# EAGLE board AVRtest (EAGLE 7.2.0)
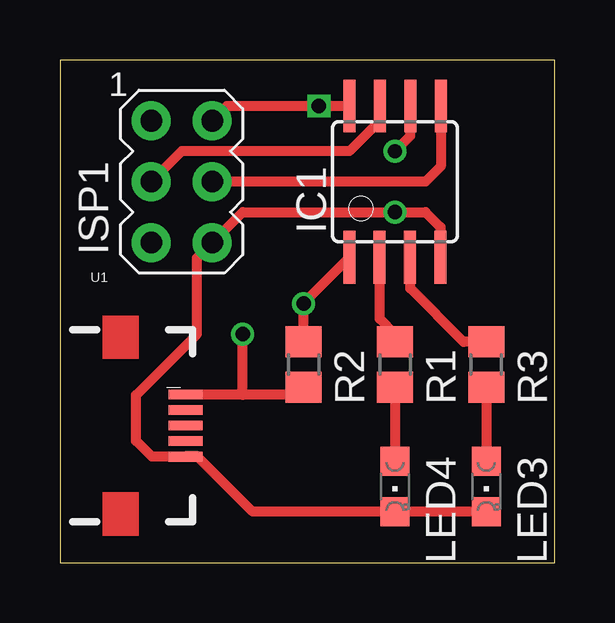
[diagram p0: board, top side]
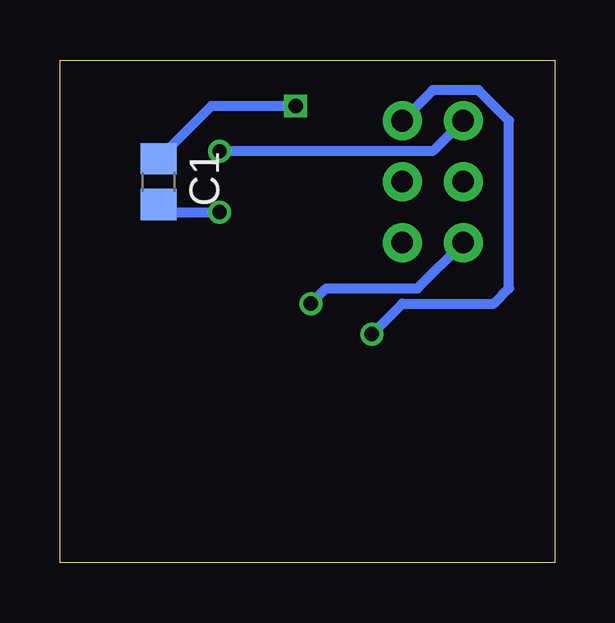
[diagram p1: board, bottom side, seen from below]

Size 20.62 x 20.95 mm. Coordinates in mm from the lower left corner, seen from the top.
Outline: 0,0 20.62,0 20.62,20.95 0,20.95 0,0
Copper layers (1*16): Top 0.0356mm / dielectric 1.5011mm / Bottom 0.0356mm
Design rules "LaenPCBOrder": minimum track width 6mil, minimum drill 13mil, track to track 6mil, track to pad 6mil, pad to pad 6mil, via to via 6mil, smd to smd 6mil, copper to edge 15mil, drill to drill 6mil, minimum pad ring 7mil, minimum via ring 7mil, stop-mask expansion 3mil, vias tented up to drill 0mil, thermal gap 10mil

## Footprints (pad centres in the part's own frame; a part is rotated, then mirrored left to right if it is on the bottom)
C0805 = smd 1.3 x 1.5: 1 -0.95,0; 2 0.95,0
SOIC8 = smd 0.5 x 2.2: 1 -1.905,-3.154; 2 -0.645,-3.154; 3 0.625,-3.154; 4 1.895,-3.154; 5 1.905,3.154; 6 0.635,3.154; 7 -0.635,3.154; 8 -1.905,3.154
AVRISP = drill 0.9 pad 1.626: 1 -1.27,2.54; 2 1.27,2.54; 3 -1.27,0; 4 1.27,0; 5 -1.27,-2.54; 6 1.27,-2.54
CHIPLED_0805 = smd 1.2 x 1.2: A 0,-1.05; C 0,1.05
R0805 = smd 1.3 x 1.5: 1 -0.95,0; 2 0.95,0
USB-MICRO-SMD = smd 1.4 x 0.4: D+1 2.7,0; D-1 2.7,0.65; GND1 2.7,-1.3; ID1 2.7,-0.65; VBUS1 2.7,1.3

## Placement (x,y rotation side)
C1  [C0805]  16.51,15.88 270 bottom
IC1  TINY85  [SOIC8]  13.97,15.88 0 top
ISP1  AVRISP-6  [AVRISP]  5.08,15.88 0 top
LED3  [CHIPLED_0805]  17.78,3.18 180 top
LED4  [CHIPLED_0805]  13.97,3.18 180 top
R1  [R0805]  13.97,8.26 270 top
R2  10K  [R0805]  10.16,8.26 270 top
R3  [R0805]  17.78,8.26 270 top
U1  [USB-MICRO-SMD]  2.54,5.71 0 top

## Library data of the parts
C1 R1-R3 = rcl
IC1 = atmel; OC_FARNELL: unknown; OC_NEWARK: unknown
ISP1 LED3 LED4 = adafruit
U1 = MicroUSB

## Nets
GND: C1.2 IC1.4 ISP1.6 LED3.C LED4.C U1.GND1
LED1: IC1.3 R3.1
LED2: IC1.2 R1.1
MISO: IC1.6 ISP1.1
MOSI: IC1.5 ISP1.4
N$1: LED3.A R3.2
N$2: LED4.A R1.2
RST: IC1.1 ISP1.5 R2.1
SCK: IC1.7 ISP1.3
VCC: C1.1 IC1.8 ISP1.2 R2.2 U1.VBUS1

## Tracks (layer width: path | path; a pad name or v marks a point on that pad's centre or on a via)
GND  (via drill 0.6)
  Top 0.406: LED3.C LED4.C 8.04,2.12 5.71,4.45 5.27,4.45 U1.GND1 3.84,4.42 3.17,5.08 3.17,6.99 5.71,9.53 5.71,12.7 ISP1.6 7.62,14.61 v13.97,14.61 15.24,14.61 15.87,13.98 IC1.4
  Bottom 0.406: C1.2 16.19,14.61 v13.97,14.61
LED1
  Top 0.406: R3.1 16.83,9.21 14.61,11.43 14.61,12.71 IC1.3
LED2
  Top 0.406: R1.1 13.97,9.53 13.33,10.16 13.33,12.71 IC1.2
MISO  (via drill 0.6)
  Top 0.406: v13.97,17.14 14.61,17.78 IC1.6
  Bottom 0.406: ISP1.1 5.08,17.14 v13.97,17.14
MOSI
  Top 0.406: IC1.5 15.88,16.51 15.24,15.88 ISP1.4
N$1
  Top 0.406: R3.2 LED3.A
N$2
  Top 0.406: R1.2 LED4.A
RST  (via drill 0.6)
  Top 0.406: IC1.1 10.16,10.82 v10.16,10.8 R2.1
  Bottom 0.406: ISP1.5 5.71,11.43 9.53,11.43 v10.16,10.8
SCK
  Top 0.406: IC1.7 13.33,18.42 12.06,17.14 5.08,17.14 ISP1.3
VCC  (via drill 0.6)
  Top 0.406: R2.2 10.16,7.02 U1.VBUS1 7.59,7.02 7.62,6.99 v7.62,9.53 | ISP1.2 6.96,19.03 v10.79,19.03 IC1.8
  Bottom 0.406: v7.62,9.53 6.35,10.8 2.54,10.8 1.91,11.43 1.91,18.42 3.17,19.68 5.08,19.68 ISP1.2 | C1.1 14.31,19.03 v10.79,19.03